# Altium PCB PCB1.PcbDoc (part 4 of 7)
Units mil, origin at the board's own origin, x right, y up, seen from the top; angles counter-clockwise.
Board outline 7650 x 4400 mil, 2 copper layers (Top Layer, Bottom Layer); 123 components, 190 nets, 788 pads, 165 vias.
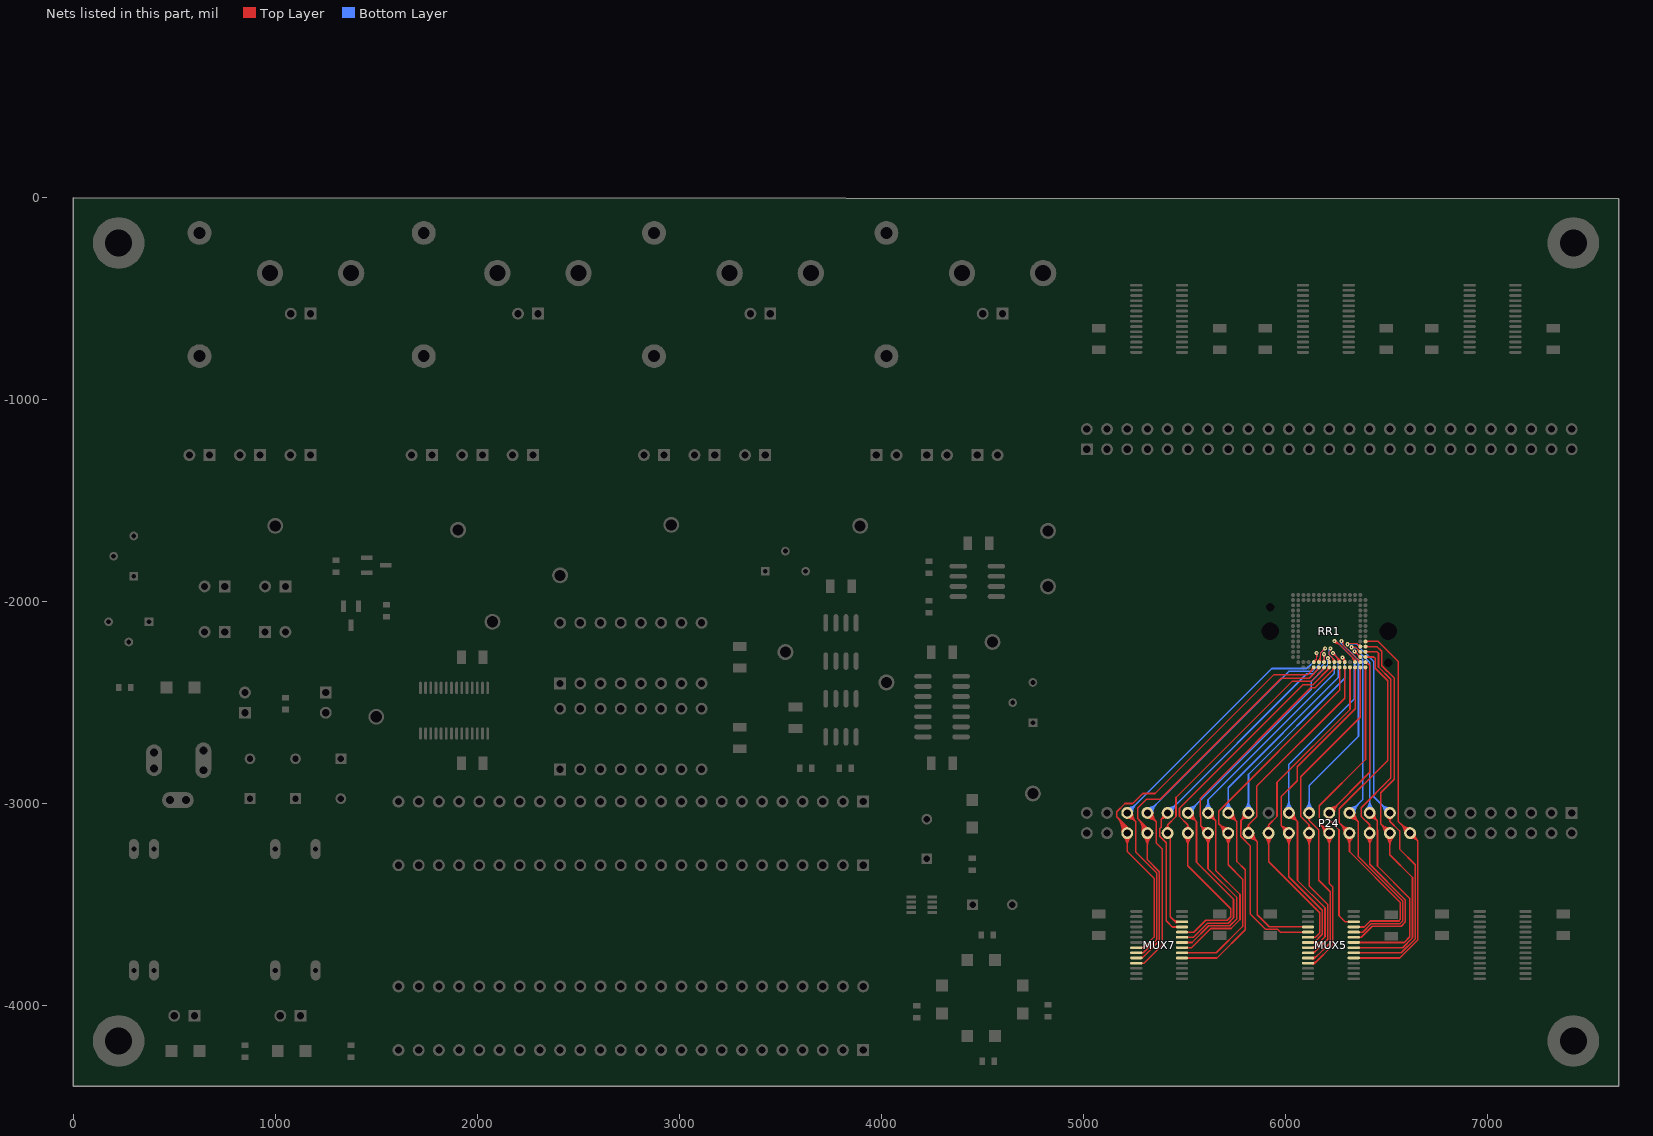
[diagram p4: the nets of this part, all layers, seen from the top]

## Via types
v1: diameter 30, hole 10, Top Layer to Bottom Layer, 118 vias
v2: diameter 20, hole 6, Top Layer to Bottom Layer, 47 vias

## Nets (pads, with @x,y where several pads share a name; then routed paths per layer and width w, separated by ;. In a path a pad name is that pad's centre, name@x,y a point inside that pad or via, vN(x,y) a via of type N, cw(c..) or ccw(c..) an arc to the next point about the centre after c; other vN are vias at no path point) (continued)
CELL64: MUX5.19 P24.18 RR1.68 | length 2336.5
  Top Layer w8: MUX5.19@6338.19,-3763.98 6566.02,-3763.98 6655,-3675 6655,-3184 ; RR1.68@6396.13,-2197.18 6459.66,-2197.18 6559,-2296.52 6559,-3088 P24.18@6617,-3146 6655,-3184 ; P24.18@6591.47,-3146 ccw(c6529.84,-3146) 6573.42,-3102.42 ccw(c6617,-3058.84) P24.18@6617,-3120.47 ; P24.18@6599.47,-3146 ccw(c6557.16,-3146) 6587.08,-3116.08 ccw(c6617,-3086.16) P24.18@6617,-3128.47 ; P24.18@6618.78,-3163.44 cw(c6621.83,-3193.35) 6643.09,-3172.09 cw(c6664.35,-3150.83) P24.18@6634.44,-3147.78 ; P24.18@6619.59,-3171.4 cw(c6624.03,-3214.97) 6655,-3184 ; P24.18@6642.4,-3148.59 ccw(c6685.97,-3153.03) 6655,-3184 ; 6368.79,-3763.98 ccw(c6368.79,-3770.95) 6363.85,-3766.02 cw(c6368.79,-3770.95) 6368.79,-3763.98 ; 6368.79,-3763.98 cw(c6368.79,-3757) 6363.85,-3761.93 ccw(c6368.79,-3757) 6368.79,-3763.98 ; 6410.24,-2197.18 ccw(c6410.24,-2211.29) 6400.27,-2201.31 cw(c6410.24,-2211.29) 6410.24,-2197.18 ; 6410.24,-2197.18 cw(c6410.24,-2183.08) 6400.27,-2193.05 ccw(c6410.24,-2183.08) 6410.24,-2197.18
CELL65: MUX5.20 P24.19 RR1.69 | length 2346.5
  Top Layer w5: v2(6307,-2211) 6311.54,-2206.46 6354.23,-2206.46 RR1.69@6370.54,-2222.77 RR1.69@6363.77,-2222.77 ; 6361.84,-2217.68 ccw(c6372.15,-2214.91) RR1.69@6370.01,-2225.38 ; 6365.45,-2214.06 cw(c6362.68,-2224.38) RR1.69@6373.15,-2222.24 ; 6358.01,-2210.24 ccw(c6370.54,-2197.7) 6370.54,-2215.43 cw(c6370.54,-2197.7) 6358.01,-2210.24 ; 6358.01,-2210.24 cw(c6345.47,-2222.77) 6363.2,-2222.77 ccw(c6345.47,-2222.77) 6358.01,-2210.24
  Top Layer w8: MUX5.20@6338.19,-3738.39 6573.23,-3738.39 6642,-3669.62 6642,-3302 6565,-3225 6565,-3135 6517,-3087 ; P24.19@6505.74,-3068.91 cw(c6496.84,-3087) 6517,-3087 ; P24.19@6517,-3046 6517,-3087 ; P24.19@6528.26,-3068.91 ccw(c6537.16,-3087) 6517,-3087 ; 6368.79,-3738.39 ccw(c6368.79,-3745.36) 6363.85,-3740.43 cw(c6368.79,-3745.36) 6368.79,-3738.39 ; 6368.79,-3738.39 cw(c6368.79,-3731.41) 6363.85,-3736.34 ccw(c6368.79,-3731.41) 6368.79,-3738.39
  Bottom Layer w5: v2(6307,-2211) 6309.5,-2208.5 6349.5,-2208.5 6386,-2245
  Bottom Layer w8: 6386,-2245 6437,-2296 6437,-2966 P24.19@6517,-3046 ; P24.19@6491.47,-3046 ccw(c6429.84,-3046) 6473.42,-3002.42 ccw(c6517,-2958.84) P24.19@6517,-3020.47 ; P24.19@6499.47,-3046 ccw(c6457.16,-3046) 6487.08,-3016.08 ccw(c6517,-2986.16) P24.19@6517,-3028.47
CELL66: MUX5.21 P24.20 RR1.70 | length 2330.1
  Top Layer w8: MUX5.21@6338.19,-3712.8 6580.44,-3712.8 6629,-3664.23 6629,-3365.23 6517,-3253.23 P24.20@6517,-3146 6472,-3101 6472,-2946 6538,-2880 6538,-2378.08 6476.85,-2316.93 6476.85,-2245.85 6453.77,-2222.77 RR1.70@6396.13,-2222.77 ; P24.20@6491.47,-3146 ccw(c6429.84,-3146) 6473.42,-3102.42 ccw(c6517,-3058.84) P24.20@6517,-3120.47 ; P24.20@6498.95,-3164.05 cw(c6455.37,-3207.63) 6517,-3207.63 cw(c6578.63,-3207.63) P24.20@6535.05,-3164.05 ; P24.20@6499.47,-3146 ccw(c6457.16,-3146) 6487.08,-3116.08 ccw(c6517,-3086.16) P24.20@6517,-3128.47 ; P24.20@6504.61,-3158.39 cw(c6474.68,-3188.32) 6517,-3188.32 cw(c6559.32,-3188.32) P24.20@6529.39,-3158.39 ; 6368.79,-3712.8 ccw(c6368.79,-3719.77) 6363.85,-3714.84 cw(c6368.79,-3719.77) 6368.79,-3712.8 ; 6368.79,-3712.8 cw(c6368.79,-3705.82) 6363.85,-3710.75 ccw(c6368.79,-3705.82) 6368.79,-3712.8 ; 6410.24,-2222.77 ccw(c6410.24,-2236.88) 6400.27,-2226.9 cw(c6410.24,-2236.88) 6410.24,-2222.77 ; 6410.24,-2222.77 cw(c6410.24,-2208.67) 6400.27,-2218.64 ccw(c6410.24,-2208.67) 6410.24,-2222.77
CELL67: MUX5.22 P24.21 RR1.71 | length 2432.5
  Top Layer w5: v2(6327,-2226) 6348.18,-2226 RR1.71@6370.54,-2248.36 ; 6361.84,-2243.27 ccw(c6372.15,-2240.5) RR1.71@6370.01,-2250.97 ; 6365.45,-2239.65 cw(c6362.68,-2249.97) RR1.71@6373.15,-2247.83 ; 6345.11,-2226 ccw(c6345.11,-2244.11) 6332.3,-2231.3 cw(c6345.11,-2244.11) 6345.11,-2226 ; 6345.11,-2226 cw(c6345.11,-2207.89) 6332.3,-2220.7 ccw(c6345.11,-2207.89) 6345.11,-2226 ; 6358.01,-2235.83 ccw(c6370.54,-2223.29) 6370.54,-2241.02 cw(c6370.54,-2223.29) 6358.01,-2235.83 ; 6358.01,-2235.83 cw(c6345.47,-2248.36) 6363.2,-2248.36 ccw(c6345.47,-2248.36) 6358.01,-2235.83
  Top Layer w8: MUX5.22@6338.19,-3687.2 6587.64,-3687.2 6616,-3658.85 6616,-3469.62 6455.53,-3309.14 6455.53,-3129.51 6455,-3128.99 6455,-3084 ; P24.21@6417,-3046 6455,-3084 ; P24.21@6418.78,-3063.44 cw(c6421.83,-3093.35) 6443.09,-3072.09 cw(c6464.35,-3050.83) P24.21@6434.44,-3047.78 ; P24.21@6419.59,-3071.4 cw(c6424.03,-3114.97) 6455,-3084 ; P24.21@6442.4,-3048.59 ccw(c6485.97,-3053.03) 6455,-3084 ; 6368.79,-3687.2 ccw(c6368.79,-3694.18) 6363.85,-3689.25 cw(c6368.79,-3694.18) 6368.79,-3687.2 ; 6368.79,-3687.2 cw(c6368.79,-3680.23) 6363.85,-3685.16 ccw(c6368.79,-3680.23) 6368.79,-3687.2
  Bottom Layer w5: v2(6327,-2226) 6329.5,-2228.5 6349.25,-2228.5 ; 6381,-2265 6359.5,-2243.5 6359.5,-2238.75 6349.25,-2228.5 ; 6349.25,-2228.5 cw(c6349.25,-2206.25) 6332.61,-2221.02 ccw(c6349.25,-2206.25) 6349.25,-2228.5 ; v2@6328.87,-2224.34 ccw(c6338.12,-2216.13) 6338.12,-2228.5 cw(c6338.12,-2216.13) v2@6328.87,-2224.34 ; v2@6332.3,-2231.3 cw(c6339.07,-2238.07) 6339.07,-2228.5 ccw(c6339.07,-2238.07) v2@6332.3,-2231.3
  Bottom Layer w8: 6381,-2265 6417,-2301 P24.21@6417,-3046 ; P24.21@6398.95,-3027.95 ccw(c6355.37,-2984.37) 6417,-2984.37 ccw(c6478.63,-2984.37) P24.21@6435.05,-3027.95 ; P24.21@6404.61,-3033.61 ccw(c6374.68,-3003.68) 6417,-3003.68 ccw(c6459.32,-3003.68) P24.21@6429.39,-3033.61
CELL68: MUX5.23 P24.22 RR1.72 | length 2136
  Top Layer w8: MUX5.23@6338.19,-3661.61 6375.2,-3661.61 6430.16,-3606.65 6572.96,-3606.65 6593.46,-3586.15 6593.46,-3476.7 6417,-3300.23 P24.22@6417,-3146 6417,-3104.73 ; RR1.72@6396.13,-2248.36 6453.21,-2248.36 6460.85,-2256 6460.85,-2323.56 6522,-2384.71 6522,-2873.37 6375.47,-3019.9 6375.47,-3063.2 6417,-3104.73 ; P24.22@6398.95,-3164.05 cw(c6355.37,-3207.63) 6417,-3207.63 cw(c6478.63,-3207.63) P24.22@6435.05,-3164.05 ; P24.22@6404.61,-3158.39 cw(c6374.68,-3188.32) 6417,-3188.32 cw(c6459.32,-3188.32) P24.22@6429.39,-3158.39 ; P24.22@6405.6,-3123.16 ccw(c6396.4,-3104.73) 6417,-3104.73 ; P24.22@6428.4,-3123.16 cw(c6437.6,-3104.73) 6417,-3104.73 ; 6368.79,-3661.61 ccw(c6368.79,-3668.59) 6363.85,-3663.66 cw(c6368.79,-3668.59) 6368.79,-3661.61 ; 6368.79,-3661.61 cw(c6368.79,-3654.64) 6363.85,-3659.57 ccw(c6368.79,-3654.64) 6368.79,-3661.61 ; 6410.24,-2248.36 ccw(c6410.24,-2262.47) 6400.27,-2252.49 cw(c6410.24,-2262.47) 6410.24,-2248.36 ; 6410.24,-2248.36 cw(c6410.24,-2234.26) 6400.27,-2244.23 ccw(c6410.24,-2234.26) 6410.24,-2248.36
CELL69: MUX5.24 P24.23 RR1.73 | length 2355.5
  Top Layer w5: v2@6339.57,-2246.57 ccw(c6350.74,-2243.96) 6347.77,-2255.05 ; v2(6342,-2246) 6342.59,-2246 RR1.73@6370.54,-2273.95 ; v2@6342.43,-2243.54 cw(c6340.58,-2254.08) 6350.92,-2251.31 ; 6361.84,-2268.86 ccw(c6372.15,-2266.09) RR1.73@6370.01,-2276.56 ; 6365.45,-2265.24 cw(c6362.68,-2275.56) RR1.73@6373.15,-2273.42 ; 6358.01,-2261.42 ccw(c6370.54,-2248.88) 6370.54,-2266.61 cw(c6370.54,-2248.88) 6358.01,-2261.42 ; 6358.01,-2261.42 cw(c6345.47,-2273.95) 6363.2,-2273.95 ccw(c6345.47,-2273.95) 6358.01,-2261.42 ; v2@6342,-2253.5 cw(c6342,-2273.03) 6355.81,-2259.22 ccw(c6342,-2273.03) v2@6342,-2253.5 ; v2@6349.5,-2246 ccw(c6366.18,-2246) 6354.39,-2257.8 cw(c6366.18,-2246) v2@6349.5,-2246
  Top Layer w8: P24.23@6317,-3046 6360,-3089 ; P24.23@6317.17,-3063.53 cw(c6317.56,-3104.49) 6346.52,-3075.52 cw(c6375.49,-3046.56) P24.23@6334.53,-3046.17 ; P24.23@6317.24,-3071.53 cw(c6317.81,-3131.18) 6360,-3089 ; MUX5.24@6338.19,-3636.02 6382.41,-3636.02 6424.78,-3593.65 6567.58,-3593.65 6580.46,-3580.77 6580.46,-3482.08 6360,-3261.62 6360,-3089 ; P24.23@6342.53,-3046.24 ccw(c6402.18,-3046.81) 6360,-3089 ; 6368.79,-3636.02 ccw(c6368.79,-3643) 6363.85,-3638.07 cw(c6368.79,-3643) 6368.79,-3636.02 ; 6368.79,-3636.02 cw(c6368.79,-3629.05) 6363.85,-3633.98 ccw(c6368.79,-3629.05) 6368.79,-3636.02
  Bottom Layer w5: v2(6342,-2246) 6366,-2270 ; 6354.8,-2258.8 ccw(c6342,-2271.61) 6342,-2253.5 cw(c6342,-2271.61) 6354.8,-2258.8 ; 6354.8,-2258.8 cw(c6367.61,-2246) 6349.5,-2246 ccw(c6367.61,-2246) 6354.8,-2258.8
  Bottom Layer w8: P24.23@6317,-3046 6382,-2981 6382,-2286 6366,-2270 ; P24.23@6317,-3028.47 ccw(c6317,-2986.16) 6346.92,-3016.08 ccw(c6376.84,-3046) P24.23@6334.53,-3046 ; P24.23@6317,-3020.47 ccw(c6317,-2958.84) 6360.58,-3002.42 ccw(c6404.16,-3046) P24.23@6342.53,-3046
CELL70: MUX5.25 P24.24 RR1.74 | length 2231.4
  Top Layer w8: P24.24@6291.47,-3146 ccw(c6229.84,-3146) 6273.42,-3102.42 ccw(c6317,-3058.84) P24.24@6317,-3120.47 ; P24.24@6298.95,-3164.05 cw(c6255.37,-3207.63) 6317,-3207.63 cw(c6378.63,-3207.63) P24.24@6335.05,-3164.05 ; P24.24@6299.47,-3146 ccw(c6257.16,-3146) 6287.08,-3116.08 ccw(c6317,-3086.16) P24.24@6317,-3128.47 ; P24.24@6304.61,-3158.39 cw(c6274.68,-3188.32) 6317,-3188.32 cw(c6359.32,-3188.32) P24.24@6329.39,-3158.39 ; MUX5.25@6338.19,-3610.43 6389.57,-3610.43 6419.35,-3580.65 6562.19,-3580.65 6567.46,-3575.38 6567.46,-3487.46 6317,-3237 P24.24@6317,-3146 6267,-3096 6267,-3026 6506,-2787 6506,-2391.34 6444.85,-2330.19 6444.85,-2281 6437.8,-2273.95 RR1.74@6396.13,-2273.95 ; 6368.79,-3610.43 ccw(c6368.79,-3617.41) 6363.85,-3612.48 cw(c6368.79,-3617.41) 6368.79,-3610.43 ; 6368.79,-3610.43 cw(c6368.79,-3603.46) 6363.85,-3608.39 ccw(c6368.79,-3603.46) 6368.79,-3610.43 ; 6410.24,-2273.95 ccw(c6410.24,-2288.06) 6400.27,-2278.08 cw(c6410.24,-2288.06) 6410.24,-2273.95 ; 6410.24,-2273.95 cw(c6410.24,-2259.85) 6400.27,-2269.82 ccw(c6410.24,-2259.85) 6410.24,-2273.95
CELL71: MUX5.26 P24.25 RR1.75 | length 1714.9
  Top Layer w8: P24.25@6208.56,-3070.09 cw(c6204.38,-3082) 6217,-3082 ; P24.25@6217,-3028.47 ccw(c6217,-2986.16) 6246.92,-3016.08 ccw(c6276.84,-3046) P24.25@6234.53,-3046 ; P24.25@6217,-3020.47 ccw(c6217,-2958.84) 6260.58,-3002.42 ccw(c6304.16,-3046) P24.25@6242.53,-3046 ; P24.25@6225.44,-3070.09 ccw(c6229.62,-3082) 6217,-3082 ; MUX5.26@6338.19,-3584.84 6294.84,-3584.84 6265,-3555 6265,-3130 6217,-3082 ; RR1.75@6396.13,-2299.54 6401.43,-2299.54 6417.98,-2316.09 6417.98,-2845.02 P24.25@6217,-3046 6217,-3082 ; 6307.59,-3584.84 ccw(c6307.59,-3577.87) 6312.52,-3582.8 cw(c6307.59,-3577.87) 6307.59,-3584.84 ; 6307.59,-3584.84 cw(c6307.59,-3591.82) 6312.52,-3586.89 ccw(c6307.59,-3591.82) 6307.59,-3584.84 ; RR1.75@6396.13,-2305.39 cw(c6396.13,-2332.28) 6415.15,-2313.26 ccw(c6396.13,-2332.28) RR1.75@6396.13,-2305.39
CELL72: MUX5.11 P24.26 RR1.76 | length 2084.7
  Top Layer w8: MUX5.11@6111.81,-3789.57 6145.43,-3789.57 6235,-3700 6235,-3413.23 6217,-3395.23 P24.26@6217,-3146 6167,-3096 6167,-3011 6396.13,-2781.87 RR1.76@6396.13,-2325.13 ; MUX5.11@6135.43,-3794.68 ccw(c6135.43,-3782.87) 6143.78,-3791.22 ; MUX5.11@6135.43,-3786.68 ccw(c6135.43,-3755.56) 6157.44,-3777.56 ; P24.26@6191.47,-3146 ccw(c6129.84,-3146) 6173.42,-3102.42 ccw(c6217,-3058.84) P24.26@6217,-3120.47 ; P24.26@6198.95,-3164.05 cw(c6155.37,-3207.63) 6217,-3207.63 cw(c6278.63,-3207.63) P24.26@6235.05,-3164.05 ; P24.26@6199.47,-3146 ccw(c6157.16,-3146) 6187.08,-3116.08 ccw(c6217,-3086.16) P24.26@6217,-3128.47 ; P24.26@6204.61,-3158.39 cw(c6174.68,-3188.32) 6217,-3188.32 cw(c6259.32,-3188.32) P24.26@6229.39,-3158.39 ; 6142.41,-3789.57 ccw(c6142.41,-3796.54) 6137.48,-3791.61 cw(c6142.41,-3796.54) 6142.41,-3789.57 ; 6142.41,-3789.57 cw(c6142.41,-3782.59) 6137.48,-3787.52 ccw(c6142.41,-3782.59) 6142.41,-3789.57 ; 6396.13,-2339.24 ccw(c6382.03,-2339.24) 6392,-2329.27 cw(c6382.03,-2339.24) 6396.13,-2339.24 ; 6396.13,-2339.24 cw(c6410.24,-2339.24) 6400.27,-2329.27 ccw(c6410.24,-2339.24) 6396.13,-2339.24
CELL73: MUX5.10 P24.27 RR1.77 | length 2405.2
  Top Layer w5: v2(6277,-2196) 6287,-2206 ; 6361.84,-2294.45 ccw(c6372.15,-2291.68) RR1.77@6370.01,-2302.15 ; 6365.45,-2290.84 cw(c6362.68,-2301.15) RR1.77@6373.15,-2299.01 ; RR1.77@6370.54,-2299.54 6287,-2216 6287,-2206 ; 6287,-2206 ccw(c6280.22,-2212.77) 6278.42,-2203.37 cw(c6280.22,-2212.77) 6287,-2206 ; 6287,-2206 cw(c6293.77,-2199.22) 6284.37,-2197.42 ccw(c6293.77,-2199.22) 6287,-2206 ; 6358.01,-2287.01 ccw(c6370.54,-2274.47) 6370.54,-2292.2 cw(c6370.54,-2274.47) 6358.01,-2287.01 ; 6358.01,-2287.01 cw(c6345.47,-2299.54) 6363.2,-2299.54 ccw(c6345.47,-2299.54) 6358.01,-2287.01
  Top Layer w8: MUX5.10@6111.81,-3763.98 6146.02,-3763.98 6222,-3688 6222,-3436.62 6165,-3379.62 6165,-3130 6117,-3082 ; P24.27@6117,-3046 6117,-3082 ; MUX5.10@6137.94,-3765.42 cw(c6152.23,-3773.67) 6147.96,-3757.73 ; 6117,-3082 ccw(c6104.38,-3082) 6108.56,-3070.09 cw(c6104.38,-3082) 6117,-3082 ; 6117,-3082 cw(c6129.62,-3082) 6125.44,-3070.09 ccw(c6129.62,-3082) 6117,-3082 ; 6142.41,-3763.98 ccw(c6142.41,-3770.95) 6137.48,-3766.02 cw(c6142.41,-3770.95) 6142.41,-3763.98 ; 6142.41,-3763.98 cw(c6142.41,-3757) 6137.48,-3761.93 ccw(c6142.41,-3757) 6142.41,-3763.98 ; MUX5.10@6135.43,-3769.09 ccw(c6135.43,-3755.86) 6144.79,-3765.21 cw(c6135.43,-3755.86) MUX5.10@6135.43,-3769.09 ; MUX5.10@6135.43,-3761.09 ccw(c6135.43,-3728.54) 6158.45,-3751.55 cw(c6135.43,-3728.54) MUX5.10@6135.43,-3761.09
  Bottom Layer w5: v2(6277,-2196) 6277,-2205.75 6334.75,-2263.5 6334.81,-2263.5 6355.65,-2284.35
  Bottom Layer w8: P24.27@6098.95,-3027.95 ccw(c6055.37,-2984.37) 6117,-2984.37 ccw(c6178.63,-2984.37) P24.27@6135.05,-3027.95 ; P24.27@6104.61,-3033.61 ccw(c6074.68,-3003.68) 6117,-3003.68 ccw(c6159.32,-3003.68) P24.27@6129.39,-3033.61 ; P24.27@6117,-3046 6117,-2911 6362,-2666 6362,-2290.69 6355.65,-2284.35
CELL74: MUX5.9 P24.28 RR1.78 | length 1926.9
  Top Layer w8: P24.28@6098.95,-3164.05 cw(c6055.37,-3207.63) 6117,-3207.63 cw(c6178.63,-3207.63) P24.28@6135.05,-3164.05 ; P24.28@6104.61,-3158.39 cw(c6074.68,-3188.32) 6117,-3188.32 cw(c6159.32,-3188.32) P24.28@6129.39,-3158.39 ; P24.28@6105.6,-3123.16 ccw(c6096.4,-3104.73) 6117,-3104.73 ; MUX5.9@6111.81,-3738.39 6141.61,-3738.39 6209,-3671 6209,-3499 6117,-3407 P24.28@6117,-3146 6117,-3104.73 ; P24.28@6128.4,-3123.16 cw(c6137.6,-3104.73) 6117,-3104.73 ; MUX5.9@6137.94,-3739.83 cw(c6152.23,-3748.08) 6147.96,-3732.14 ; RR1.78@6366.41,-2329.27 cw(c6356.44,-2339.24) 6370.54,-2339.24 cw(c6384.65,-2339.24) RR1.78@6374.67,-2329.27 ; RR1.78@6370.54,-2325.13 6370.54,-2572.46 6075.47,-2867.53 6075.47,-3063.2 6117,-3104.73 ; MUX5.9@6135.43,-3735.5 ccw(c6135.43,-3713.6) 6150.92,-3729.08 cw(c6135.43,-3713.6) MUX5.9@6135.43,-3735.5
CELL75: MUX5.8 P24.29 RR1.79 | length 2733.4
  Top Layer w5: v2@6239.82,-2197.23 ccw(c6255.81,-2188.19) 6251.05,-2205.93 ; v2(6242,-2196) 6251.04,-2196 6343.14,-2288.09 6344.95,-2288.09 ; v2@6244.18,-2194.77 ccw(c6270.35,-2179.96) 6262.57,-2209.01 ; v2@6245.75,-2202.5 cw(c6250.68,-2211.04) 6253.23,-2201.51 ; 6332.21,-2279.38 ccw(c6361.06,-2271.65) RR1.79@6346.12,-2297.51 ; 6335.33,-2291.04 ccw(c6352.52,-2286.43) RR1.79@6343.62,-2301.84 ; RR1.79@6338.59,-2295.87 ccw(c6329.93,-2290.87) 6339.59,-2288.28 ; RR1.79@6344.95,-2299.54 6344.95,-2288.09 ; 6344.95,-2288.1 ccw(c6350.21,-2288.1) 6348.02,-2292.87 cw(c6350.21,-2288.1) 6344.95,-2288.1 ; 6344.95,-2288.1 cw(c6339.7,-2288.1) 6341.89,-2292.87 ccw(c6339.7,-2288.1) 6344.95,-2288.1 ; v2@6242,-2203.5 cw(c6242,-2243.43) 6270.24,-2215.2 ccw(c6242,-2243.43) v2@6242,-2203.5 ; v2@6242,-2198.5 cw(c6242,-2226.36) 6261.7,-2206.66 ccw(c6242,-2226.36) v2@6242,-2198.5 ; v2@6242,-2193.5 cw(c6242,-2209.29) 6253.17,-2198.13 ccw(c6242,-2209.29) v2@6242,-2193.5 ; 6325.61,-2270.57 cw(c6296.63,-2299.54) 6337.61,-2299.54 ccw(c6296.63,-2299.54) 6325.61,-2270.57 ; 6334.14,-2279.1 cw(c6313.7,-2299.54) 6342.61,-2299.54 ccw(c6313.7,-2299.54) 6334.14,-2279.1 ; 6342.68,-2287.64 cw(c6330.77,-2299.54) 6347.61,-2299.54 ccw(c6330.77,-2299.54) 6342.68,-2287.64
  Top Layer w8: P24.29@6017,-3046 6060,-3089 ; P24.29@6017.17,-3063.53 cw(c6017.56,-3104.49) 6046.52,-3075.52 cw(c6075.49,-3046.56) P24.29@6034.53,-3046.17 ; P24.29@6017.24,-3071.53 cw(c6017.81,-3131.18) 6060,-3089 ; P24.29@6042.53,-3046.24 ccw(c6102.18,-3046.81) 6060,-3089 ; MUX5.8@6111.81,-3712.8 6142.2,-3712.8 6196,-3659 6196,-3516 6060,-3380 6060,-3089 ; MUX5.8@6137.94,-3714.24 cw(c6152.23,-3722.49) 6147.96,-3706.55 ; MUX5.8@6135.43,-3709.91 ccw(c6135.43,-3686.58) 6151.93,-3703.07 cw(c6135.43,-3686.58) MUX5.8@6135.43,-3709.91
  Bottom Layer w5: v2(6242,-2196) 6251.04,-2196 6342,-2286.96
  Bottom Layer w8: P24.29@5998.95,-3027.95 ccw(c5955.37,-2984.37) 6017,-2984.37 ccw(c6078.63,-2984.37) P24.29@6035.05,-3027.95 ; P24.29@6004.61,-3033.61 ccw(c5974.68,-3003.68) 6017,-3003.68 ccw(c6059.32,-3003.68) P24.29@6029.39,-3033.61 ; P24.29@6017,-3046 6017,-2806 6342,-2481 6342,-2286.96
CELL76: MUX5.7 P24.30 RR1.80 | length 2039.6
  Top Layer w8: P24.30@5991.58,-3143.68 ccw(c5946.39,-3139.56) 5978.47,-3107.47 ; P24.30@5998.95,-3164.05 cw(c5955.37,-3207.63) 6017,-3207.63 cw(c6078.63,-3207.63) P24.30@6035.05,-3164.05 ; P24.30@5999.54,-3144.41 ccw(c5968.52,-3141.58) 5990.55,-3119.55 ccw(c6012.58,-3097.52) P24.30@6015.41,-3128.54 ; P24.30@6004.61,-3158.39 cw(c5974.68,-3188.32) 6017,-3188.32 cw(c6059.32,-3188.32) P24.30@6029.39,-3158.39 ; P24.30@6014.68,-3120.58 cw(c6010.56,-3075.39) 5978.47,-3107.47 ; MUX5.7@6111.81,-3687.2 6142.8,-3687.2 6183,-3647 6183,-3528 6017,-3362 P24.30@6017,-3146 5978.47,-3107.47 ; MUX5.7@6137.94,-3688.65 cw(c6152.23,-3696.9) 6147.96,-3680.96 ; RR1.80@6340.82,-2329.27 cw(c6330.85,-2339.24) 6344.95,-2339.24 cw(c6359.06,-2339.24) RR1.80@6349.08,-2329.27 ; RR1.80@6344.95,-2325.13 6344.95,-2530.67 6058.53,-2817.1 6058.53,-2886.47 5978.47,-2966.53 5978.47,-3107.47 ; 6142.41,-3687.2 ccw(c6142.41,-3694.18) 6137.48,-3689.25 cw(c6142.41,-3694.18) 6142.41,-3687.2 ; 6142.41,-3687.2 cw(c6142.41,-3680.23) 6137.48,-3685.16 ccw(c6142.41,-3680.23) 6142.41,-3687.2 ; MUX5.7@6135.43,-3684.31 ccw(c6135.43,-3659.56) 6152.93,-3677.07 cw(c6135.43,-3659.56) MUX5.7@6135.43,-3684.31
CELL77: MUX5.6 P24.32 RR1.82 | length 1928.6
  Top Layer w8: P24.32@5898.95,-3164.05 cw(c5855.37,-3207.63) 5917,-3207.63 cw(c5978.63,-3207.63) P24.32@5935.05,-3164.05 ; P24.32@5904.61,-3158.39 cw(c5874.68,-3188.32) 5917,-3188.32 cw(c5959.32,-3188.32) P24.32@5929.39,-3158.39 ; P24.32@5905.6,-3123.16 ccw(c5896.4,-3104.73) 5917,-3104.73 ; P24.32@5928.4,-3123.16 cw(c5937.6,-3104.73) 5917,-3104.73 ; MUX5.6@6111.81,-3661.61 6148.39,-3661.61 6170,-3640 6170,-3540 5917,-3287 P24.32@5917,-3146 5917,-3104.73 ; RR1.82@6319.36,-2325.13 6319.36,-2533.64 5958.53,-2894.47 5958.53,-3063.2 5917,-3104.73 ; 6142.41,-3661.61 ccw(c6142.41,-3668.59) 6137.48,-3663.66 cw(c6142.41,-3668.59) 6142.41,-3661.61 ; 6142.41,-3661.61 cw(c6142.41,-3654.64) 6137.48,-3659.57 ccw(c6142.41,-3654.64) 6142.41,-3661.61 ; 6319.36,-2339.24 ccw(c6305.26,-2339.24) 6315.23,-2329.27 cw(c6305.26,-2339.24) 6319.36,-2339.24 ; 6319.36,-2339.24 cw(c6333.47,-2339.24) 6323.49,-2329.27 ccw(c6333.47,-2339.24) 6319.36,-2339.24
CELL78: MUX5.5 P24.33 RR1.83 | length 2589.9
  Top Layer w5: v2@6279.66,-2276.88 ccw(c6291.47,-2272.44) 6288.96,-2284.81 ; v2@6281.45,-2283.48 cw(c6280.71,-2293.73) 6289.61,-2288.59 cw(c6299.24,-2283.03) v2@6288.94,-2278.83 ; v2@6282.88,-2273.66 cw(c6278.44,-2285.47) 6290.81,-2282.96 ; v2@6283.37,-2283.37 cw(c6284.14,-2287.49) 6287.76,-2285.4 cw(c6291.69,-2283.13) v2@6288.04,-2280.45 ; 6287.48,-2288.35 ccw(c6305.23,-2289.65) RR1.83@6291.76,-2301.28 ; 6287.68,-2285.25 cw(c6282.63,-2290.29) RR1.83@6288.12,-2294.85 ; 6291.56,-2289.13 cw(c6286.87,-2293.81) RR1.83@6291.97,-2298.05 ; RR1.83@6293.77,-2299.54 6293.77,-2287.77 ; v2@6281.67,-2283.49 cw(c6281.08,-2296.68) RR1.83@6292.51,-2290.08 ; v2@6281.67,-2283.49 cw(c6281.08,-2296.68) RR1.83@6292.51,-2290.08 ; v2@6281.67,-2283.49 cw(c6281.08,-2296.68) RR1.83@6292.51,-2290.08 ; v2(6282,-2276) cw(c6267.58,-2290.42) 6286.84,-2297.13 ccw(c6267.58,-2290.42) v2(6282,-2276) ; v2(6282,-2276) 6293.77,-2287.77 ; v2@6283.4,-2283.37 cw(c6284.09,-2286.98) 6287.28,-2285.14 ; v2@6283.4,-2283.37 cw(c6284.09,-2286.98) 6287.28,-2285.14 ; v2@6283.4,-2283.37 cw(c6284.09,-2286.98) 6287.28,-2285.14 ; 6287.28,-2285.14 cw(c6290.46,-2283.3) v2@6287.68,-2280.9 ; 6287.28,-2285.14 cw(c6290.46,-2283.3) v2@6287.68,-2280.9 ; 6287.28,-2285.14 cw(c6290.46,-2283.3) v2@6287.68,-2280.9 ; v2@6289.24,-2277.94 ccw(c6299.93,-2280.8) 6290.35,-2286.34 ; v2@6289.24,-2277.94 ccw(c6299.93,-2280.8) 6290.35,-2286.34 ; v2@6289.24,-2277.94 ccw(c6299.93,-2280.8) 6290.35,-2286.34 ; 6293.77,-2287.77 ccw(c6299.54,-2287.77) 6297,-2292.95 cw(c6299.54,-2287.77) 6293.77,-2287.77 ; 6293.77,-2287.77 cw(c6288.01,-2287.77) 6290.54,-2292.95 ccw(c6288.01,-2287.77) 6293.77,-2287.77 ; 6293.77,-2287.77 ccw(c6283.36,-2298.18) 6282.46,-2283.49 cw(c6283.36,-2298.18) 6293.77,-2287.77 ; 6293.77,-2287.77 cw(c6304.18,-2277.36) 6289.49,-2276.46 ccw(c6304.18,-2277.36) 6293.77,-2287.77 ; v2@6287.64,-2281.64 cw(c6275.94,-2293.33) 6291.56,-2298.77 ccw(c6275.94,-2293.33) v2@6287.64,-2281.64 ; 6293.27,-2287.27 cw(c6284.3,-2296.24) 6296.28,-2300.42 ccw(c6284.3,-2296.24) 6293.27,-2287.27
  Top Layer w8: P24.33@5791.66,-3049.12 cw(c5751.11,-3054.11) 5780,-3083 ; P24.33@5799.6,-3048.14 cw(c5771.76,-3051.57) 5791.6,-3071.4 cw(c5811.43,-3091.24) P24.33@5814.86,-3063.4 ; P24.33@5813.88,-3071.34 ccw(c5808.89,-3111.89) 5780,-3083 ; P24.33@5817,-3046 5780,-3083 ; MUX5.5@6111.81,-3636.02 5975.72,-3636.02 5962.19,-3622.5 5902.5,-3622.5 5825,-3545 5825,-3208.49 5778.47,-3161.96 5778.47,-3128.51 5780,-3126.99 5780,-3083 ; 6081.21,-3636.02 ccw(c6081.21,-3629.05) 6086.15,-3633.98 cw(c6081.21,-3629.05) 6081.21,-3636.02 ; 6081.21,-3636.02 cw(c6081.21,-3643) 6086.15,-3638.07 ccw(c6081.21,-3643) 6081.21,-3636.02
  Bottom Layer w5: v2(6282,-2276) 6293.77,-2287.77 ; 6293.77,-2340 6293.77,-2287.77 ; 6293.77,-2287.77 ccw(c6283.36,-2298.18) 6282.46,-2283.49 cw(c6283.36,-2298.18) 6293.77,-2287.77 ; 6293.77,-2287.77 cw(c6304.18,-2277.36) 6289.49,-2276.46 ccw(c6304.18,-2277.36) 6293.77,-2287.77
  Bottom Layer w8: P24.33@5798.95,-3027.95 ccw(c5755.37,-2984.37) 5817,-2984.37 ccw(c5878.63,-2984.37) P24.33@5835.05,-3027.95 ; P24.33@5804.61,-3033.61 ccw(c5774.68,-3003.68) 5817,-3003.68 ccw(c5859.32,-3003.68) P24.33@5829.39,-3033.61 ; P24.33@5817,-3046 5817,-2856 6293.77,-2379.23 6293.77,-2340
CELL79: MUX5.4 P24.34 RR1.84 | length 1960.6
  Top Layer w8: P24.34@5805.6,-3123.16 ccw(c5796.4,-3104.73) 5817,-3104.73 ; P24.34@5817.17,-3163.53 cw(c5817.56,-3204.49) 5846.52,-3175.52 cw(c5875.49,-3146.56) P24.34@5834.53,-3146.17 ; P24.34@5817.24,-3171.53 cw(c5817.81,-3231.18) 5860,-3189 ; P24.34@5828.4,-3123.16 cw(c5837.6,-3104.73) 5817,-3104.73 ; P24.34@5842.53,-3146.24 ccw(c5902.18,-3146.81) 5860,-3189 ; MUX5.4@6111.81,-3610.43 6110.87,-3609.5 5919.8,-3609.5 5860,-3549.7 5860,-3189 ; RR1.84@6289.64,-2329.27 cw(c6279.67,-2339.24) 6293.77,-2339.24 cw(c6307.88,-2339.24) RR1.84@6297.9,-2329.27 ; RR1.84@6293.77,-2325.13 6293.77,-2477.79 5858.53,-2913.04 5858.53,-3063.2 5817,-3104.73 ; 5817,-3104.73 P24.34@5817,-3146 5860,-3189 ; 6078.95,-3609.5 cw(c6078.95,-3619.67) 6086.15,-3612.48 ccw(c6078.95,-3619.67) 6078.95,-3609.5
CELL80: MUX7.19 P24.35 RR1.85 | length 2784.7
  Top Layer w5: v2@6232.87,-2255.93 ccw(c6243.73,-2253.71) 6240.86,-2264.41 ; v2(6235.32,-2255.43) 6268.18,-2288.29 ; v2@6235.82,-2252.98 cw(c6233.6,-2263.84) 6244.3,-2260.97 ; 6255.44,-2279.38 ccw(c6284.29,-2271.65) RR1.85@6269.35,-2297.51 ; 6258.56,-2291.04 ccw(c6275.75,-2286.43) RR1.85@6266.85,-2301.84 ; RR1.85@6261.82,-2295.87 ccw(c6253.16,-2290.87) 6262.82,-2288.28 ; 6263.33,-2290.17 ccw(c6274.45,-2287.19) RR1.85@6269.24,-2297.45 ; RR1.85@6268.18,-2299.54 6268.18,-2288.29 ; 6248.12,-2268.23 ccw(c6235.32,-2281.04) 6235.32,-2262.93 cw(c6235.32,-2281.04) 6248.12,-2268.23 ; 6248.12,-2268.23 cw(c6260.93,-2255.43) 6242.82,-2255.43 ccw(c6260.93,-2255.43) 6248.12,-2268.23 ; 6268.18,-2288.29 ccw(c6273.13,-2288.29) 6271.14,-2292.82 cw(c6273.13,-2288.29) 6268.18,-2288.29 ; 6268.18,-2288.29 cw(c6263.23,-2288.29) 6265.22,-2292.82 ccw(c6263.23,-2288.29) 6268.18,-2288.29 ; 6247.69,-2267.8 cw(c6215.95,-2299.54) 6260.84,-2299.54 ccw(c6215.95,-2299.54) 6247.69,-2267.8 ; 6256.23,-2276.33 cw(c6233.02,-2299.54) 6265.84,-2299.54 ccw(c6233.02,-2299.54) 6256.23,-2276.33 ; 6264.76,-2284.87 cw(c6250.09,-2299.54) 6270.84,-2299.54 ccw(c6250.09,-2299.54) 6264.76,-2284.87
  Top Layer w8: MUX7.19@5488.19,-3763.98 5661.02,-3763.98 5801,-3624 5801,-3327.23 5760,-3286.23 5760,-3089 ; P24.35@5717,-3046 5760,-3089 ; P24.35@5717.17,-3063.53 cw(c5717.56,-3104.49) 5746.52,-3075.52 cw(c5775.49,-3046.56) P24.35@5734.53,-3046.17 ; P24.35@5717.24,-3071.53 cw(c5717.81,-3131.18) 5760,-3089 ; P24.35@5742.53,-3046.24 ccw(c5802.18,-3046.81) 5760,-3089 ; 5518.79,-3763.98 ccw(c5518.79,-3770.95) 5513.85,-3766.02 cw(c5518.79,-3770.95) 5518.79,-3763.98 ; 5518.79,-3763.98 cw(c5518.79,-3757) 5513.85,-3761.93 ccw(c5518.79,-3757) 5518.79,-3763.98
  Bottom Layer w5: v2(6235.32,-2255.43) 6262,-2282.11 6262,-2340 ; 6248.12,-2268.23 ccw(c6235.32,-2281.04) 6235.32,-2262.93 cw(c6235.32,-2281.04) 6248.12,-2268.23 ; 6248.12,-2268.23 cw(c6260.93,-2255.43) 6242.82,-2255.43 ccw(c6260.93,-2255.43) 6248.12,-2268.23
  Bottom Layer w8: P24.35@5698.95,-3027.95 ccw(c5655.37,-2984.37) 5717,-2984.37 ccw(c5778.63,-2984.37) P24.35@5735.05,-3027.95 ; P24.35@5704.61,-3033.61 ccw(c5674.68,-3003.68) 5717,-3003.68 ccw(c5759.32,-3003.68) P24.35@5729.39,-3033.61 ; P24.35@5717,-3046 5717,-2921 6262,-2376 6262,-2340
CELL81: MUX7.20 P24.36 RR1.86 | length 2304
  Top Layer w8: MUX7.20@5488.19,-3738.39 5657.61,-3738.39 5788,-3608 5788,-3373.62 5717,-3302.62 P24.36@5717,-3146 5670,-3099 5670,-3037.41 6268.18,-2439.23 RR1.86@6268.18,-2325.13 ; P24.36@5691.47,-3146 ccw(c5629.84,-3146) 5673.42,-3102.42 ccw(c5717,-3058.84) P24.36@5717,-3120.47 ; P24.36@5698.95,-3164.05 cw(c5655.37,-3207.63) 5717,-3207.63 cw(c5778.63,-3207.63) P24.36@5735.05,-3164.05 ; P24.36@5699.47,-3146 ccw(c5657.16,-3146) 5687.08,-3116.08 ccw(c5717,-3086.16) P24.36@5717,-3128.47 ; P24.36@5704.61,-3158.39 cw(c5674.68,-3188.32) 5717,-3188.32 cw(c5759.32,-3188.32) P24.36@5729.39,-3158.39 ; RR1.86@6264.05,-2329.27 cw(c6254.08,-2339.24) 6268.18,-2339.24 cw(c6282.29,-2339.24) RR1.86@6272.31,-2329.27 ; 5518.79,-3738.39 ccw(c5518.79,-3745.36) 5513.85,-3740.43 cw(c5518.79,-3745.36) 5518.79,-3738.39 ; 5518.79,-3738.39 cw(c5518.79,-3731.41) 5513.85,-3736.34 ccw(c5518.79,-3731.41) 5518.79,-3738.39
CELL82: MUX7.21 P24.37 RR1.87 | length 2609.8
  Top Layer w5: v2(6222,-2231) 6223.5,-2232.5 6223.5,-2242.5 6217.82,-2248.18 6217.82,-2262.68 6228.07,-2272.93 ; 6235,-2289.18 ccw(c6252.78,-2288.35) RR1.87@6240.8,-2301.51 ; RR1.87@6237.16,-2294.6 ccw(c6229.77,-2287.87) 6239.76,-2287.4 ; 6239.81,-2288.54 ccw(c6253.17,-2287.92) RR1.87@6244.17,-2297.81 ; RR1.87@6242,-2298.95 RR1.87@6242.59,-2299.54 6242.59,-2287.45 ; 6228.07,-2272.93 cw(c6208.83,-2292.17) 6235.42,-2297.98 ccw(c6208.83,-2292.17) 6228.07,-2272.93 ; 6228.07,-2272.93 6242.59,-2287.45 ; 6242.59,-2287.45 ccw(c6248.88,-2287.45) 6245.98,-2293.03 cw(c6248.88,-2287.45) 6242.59,-2287.45 ; 6242.59,-2287.45 cw(c6236.3,-2287.45) 6239.2,-2293.03 ccw(c6236.3,-2287.45) 6242.59,-2287.45 ; 6234.54,-2279.4 cw(c6219.45,-2294.49) 6240.3,-2299.04 ccw(c6219.45,-2294.49) 6234.54,-2279.4 ; 6241.01,-2285.87 cw(c6230.07,-2296.81) 6245.19,-2300.11 ccw(c6230.07,-2296.81) 6241.01,-2285.87
  Top Layer w8: MUX7.21@5488.19,-3712.8 5535.2,-3712.8 5630,-3618 5730.38,-3618 5775,-3573.38 5775,-3450 5655.53,-3330.53 5655.53,-3129.51 5655,-3128.99 5655,-3084 ; P24.37@5617,-3046 5655,-3084 ; P24.37@5618.78,-3063.44 cw(c5621.83,-3093.35) 5643.09,-3072.09 cw(c5664.35,-3050.83) P24.37@5634.44,-3047.78 ; P24.37@5619.59,-3071.4 cw(c5624.03,-3114.97) 5655,-3084 ; P24.37@5642.4,-3048.59 ccw(c5685.97,-3053.03) 5655,-3084 ; 5518.79,-3712.8 ccw(c5518.79,-3719.77) 5513.85,-3714.84 cw(c5518.79,-3719.77) 5518.79,-3712.8 ; 5518.79,-3712.8 cw(c5518.79,-3705.82) 5513.85,-3710.75 ccw(c5518.79,-3705.82) 5518.79,-3712.8
  Bottom Layer w5: v2(6222,-2231) 6217.82,-2235.18 6217.82,-2262.68 6228.07,-2272.93 6242,-2286.86 6242,-2321.43
  Bottom Layer w8: P24.37@5598.95,-3027.95 ccw(c5555.37,-2984.37) 5617,-2984.37 ccw(c5678.63,-2984.37) P24.37@5635.05,-3027.95 ; P24.37@5604.61,-3033.61 ccw(c5574.68,-3003.68) 5617,-3003.68 ccw(c5659.32,-3003.68) P24.37@5629.39,-3033.61 ; P24.37@5617,-3046 5617,-2981 6242,-2356 6242,-2321.43
CELL83: MUX7.22 P24.38 RR1.88 | length 2279.8
  Top Layer w8: MUX7.22@5488.19,-3687.2 5537.8,-3687.2 5620,-3605 5725,-3605 5760,-3570 5760,-3465 5617,-3322 P24.38@5617,-3146 5580,-3109 ; P24.38@5591.66,-3142.88 ccw(c5551.11,-3137.89) 5580,-3109 ; P24.38@5598.95,-3164.05 cw(c5555.37,-3207.63) 5617,-3207.63 cw(c5678.63,-3207.63) P24.38@5635.05,-3164.05 ; P24.38@5599.6,-3143.86 ccw(c5571.76,-3140.43) 5591.6,-3120.6 ccw(c5611.43,-3100.76) P24.38@5614.86,-3128.6 ; P24.38@5604.61,-3158.39 cw(c5574.68,-3188.32) 5617,-3188.32 cw(c5659.32,-3188.32) P24.38@5629.39,-3158.39 ; P24.38@5613.88,-3120.66 cw(c5608.89,-3080.11) 5580,-3109 ; RR1.88@6242.59,-2325.13 6242.59,-2330.43 6146.05,-2426.98 6126.02,-2426.98 5578.47,-2974.53 5578.47,-3063.49 5580,-3065.01 5580,-3109 ; 5518.79,-3687.2 ccw(c5518.79,-3694.18) 5513.85,-3689.25 cw(c5518.79,-3694.18) 5518.79,-3687.2 ; 5518.79,-3687.2 cw(c5518.79,-3680.23) 5513.85,-3685.16 ccw(c5518.79,-3680.23) 5518.79,-3687.2 ; 6228.87,-2344.15 ccw(c6209.85,-2325.13) 6236.75,-2325.13 cw(c6209.85,-2325.13) 6228.87,-2344.15
CELL84: MUX7.23 P24.39 RR1.89 | length 2489.1
  Top Layer w5: v2(6210,-2280) v2@6217,-2287 ; RR1.89@6217,-2299.54 v2@6217,-2287 ; v2@6209.43,-2282.43 cw(c6206.78,-2293.74) RR1.89@6218,-2290.74 ; v2@6209.43,-2282.43 cw(c6206.78,-2293.74) RR1.89@6218,-2290.74 ; v2@6209.43,-2282.43 cw(c6206.78,-2293.74) RR1.89@6218,-2290.74 ; v2@6217,-2287 ccw(c6224.04,-2287) 6220.59,-2293.14 cw(c6224.04,-2287) v2@6217,-2287 ; v2@6217,-2287 cw(c6209.96,-2287) 6213.41,-2293.14 ccw(c6209.96,-2287) v2@6217,-2287 ; v2@6207.42,-2287.04 cw(c6202.39,-2300.76) 6217,-2300.76 ccw(c6202.39,-2300.76) v2@6207.42,-2287.04 ; v2@6209.14,-2282.35 cw(c6205.01,-2293.6) 6217,-2293.6 ccw(c6205.01,-2293.6) v2@6209.14,-2282.35
  Top Layer w8: MUX7.23@5488.19,-3661.61 5545,-3661.61 5614.62,-3592 5716.38,-3592 5743,-3565.38 5743,-3473 5560,-3290 5560,-3089 ; P24.39@5517,-3046 5560,-3089 ; P24.39@5517.17,-3063.53 cw(c5517.56,-3104.49) 5546.52,-3075.52 cw(c5575.49,-3046.56) P24.39@5534.53,-3046.17 ; P24.39@5517.24,-3071.53 cw(c5517.81,-3131.18) 5560,-3089 ; P24.39@5542.53,-3046.24 ccw(c5602.18,-3046.81) 5560,-3089 ; 5518.79,-3661.61 ccw(c5518.79,-3668.59) 5513.85,-3663.66 cw(c5518.79,-3668.59) 5518.79,-3661.61 ; 5518.79,-3661.61 cw(c5518.79,-3654.64) 5513.85,-3659.57 ccw(c5518.79,-3654.64) 5518.79,-3661.61
  Bottom Layer w5: 6190,-2333 6210,-2313 v2(6210,-2280) ; v2@6204.7,-2285.3 cw(c6191.89,-2298.11) 6210,-2298.11 cw(c6228.11,-2298.11) v2@6215.3,-2285.3
  Bottom Layer w8: P24.39@5517,-3046 6127,-2436 6127,-2396 6190,-2333 ; P24.39@5517,-3028.47 ccw(c5517,-2986.16) 5546.92,-3016.08 ccw(c5576.84,-3046) P24.39@5534.53,-3046 ; P24.39@5517,-3020.47 ccw(c5517,-2958.84) 5560.58,-3002.42 ccw(c5604.16,-3046) P24.39@5542.53,-3046
CELL85: MUX7.24 P24.40 RR1.90 | length 2222.8
  Top Layer w8: MUX7.24@5488.19,-3636.02 5546.48,-3636.02 5605,-3577.5 5712.19,-3577.5 5714.7,-3575 5715,-3575 5730,-3560 5730,-3520 5517,-3307 P24.40@5517,-3146 5517,-3104.73 ; P24.40@5498.95,-3164.05 cw(c5455.37,-3207.63) 5517,-3207.63 cw(c5578.63,-3207.63) P24.40@5535.05,-3164.05 ; P24.40@5504.61,-3158.39 cw(c5474.68,-3188.32) 5517,-3188.32 cw(c5559.32,-3188.32) P24.40@5529.39,-3158.39 ; P24.40@5505.6,-3123.16 ccw(c5496.4,-3104.73) 5517,-3104.73 ; P24.40@5528.4,-3123.16 cw(c5537.6,-3104.73) 5517,-3104.73 ; RR1.90@6217,-2325.13 6217,-2330.43 6136.46,-2410.98 6087.02,-2410.98 5475.47,-3022.53 5475.47,-3063.2 5517,-3104.73 ; 5518.79,-3636.02 ccw(c5518.79,-3643) 5513.85,-3638.07 cw(c5518.79,-3643) 5518.79,-3636.02 ; 5518.79,-3636.02 cw(c5518.79,-3629.05) 5513.85,-3633.98 ccw(c5518.79,-3629.05) 5518.79,-3636.02 ; 6203.28,-2344.15 ccw(c6184.26,-2325.13) 6211.16,-2325.13 cw(c6184.26,-2325.13) 6203.28,-2344.15
CELL86: MUX7.25 P24.41 RR1.91 | length 2277.7
  Top Layer w5: v2(6191.41,-2260.5) RR1.91@6191.41,-2299.54 RR1.91@6194.62,-2296.33 ; v2@6194.62,-2263.87 v2@6198,-2260.5 ; 6191.41,-2281.82 ccw(c6209.14,-2281.82) 6196.6,-2294.35 cw(c6209.14,-2281.82) 6191.41,-2281.82 ; 6191.41,-2281.82 cw(c6173.68,-2281.82) 6186.22,-2294.35 ccw(c6173.68,-2281.82) 6191.41,-2281.82 ; 6191.41,-2278.6 ccw(c6173.3,-2278.6) 6186.11,-2265.8 cw(c6173.3,-2278.6) 6191.41,-2278.6 ; 6191.41,-2278.6 cw(c6209.52,-2278.6) 6196.71,-2265.8 ccw(c6209.52,-2278.6) 6191.41,-2278.6
  Top Layer w8: P24.41@5392.22,-3052.11 cw(c5365.66,-3058.66) 5385,-3078 ; P24.41@5399.98,-3050.2 cw(c5381.75,-3054.69) 5395.03,-3067.97 cw(c5408.31,-3081.25) P24.41@5412.8,-3063.02 ; P24.41@5410.89,-3070.78 ccw(c5404.34,-3097.34) 5385,-3078 ; P24.41@5417,-3046 5385,-3078 ; MUX7.25@5488.19,-3610.43 5440.43,-3610.43 5410,-3580 5410,-3193.49 5378.47,-3161.96 5378.47,-3123.51 5385,-3116.99 5385,-3078 ; 5457.59,-3610.43 ccw(c5457.59,-3603.46) 5462.52,-3608.39 cw(c5457.59,-3603.46) 5457.59,-3610.43 ; 5457.59,-3610.43 cw(c5457.59,-3617.41) 5462.52,-3612.48 ccw(c5457.59,-3617.41) 5457.59,-3610.43
  Bottom Layer w5: 6171.38,-2325 6192,-2304.38 v2@6192,-2260.5 ; v2@6186.11,-2265.8 cw(c6171.88,-2280.03) 6192,-2280.03 ccw(c6171.88,-2280.03) v2@6186.11,-2265.8 ; 6192,-2277.18 cw(c6208.09,-2277.18) 6196.71,-2265.8 ccw(c6208.09,-2277.18) 6192,-2277.18
  Bottom Layer w8: P24.41@5417,-3046 6106,-2357 6139.38,-2357 6171.38,-2325 ; P24.41@5417,-3028.47 ccw(c5417,-2986.16) 5446.92,-3016.08 ccw(c5476.84,-3046) P24.41@5434.53,-3046 ; P24.41@5417,-3020.47 ccw(c5417,-2958.84) 5460.58,-3002.42 ccw(c5504.16,-3046) P24.41@5442.53,-3046
CELL87: MUX7.26 P24.42 RR1.92 | length 1872.6
  Top Layer w8: P24.42@5405.6,-3123.16 ccw(c5396.4,-3104.73) 5417,-3104.73 ; P24.42@5428.4,-3123.16 cw(c5437.6,-3104.73) 5417,-3104.73 ; 5452.04,-3578.6 cw(c5447.77,-3594.54) MUX7.26@5462.06,-3586.29 ; MUX7.26@5488.19,-3584.84 5454.84,-3584.84 5430,-3560 5430,-3159 P24.42@5417,-3146 5417,-3104.73 ; RR1.92@6191.41,-2325.13 6191.41,-2330.43 6126.87,-2394.98 6033.02,-2394.98 5458.53,-2969.47 5458.53,-3063.2 5417,-3104.73 ; 5457.59,-3584.84 ccw(c5457.59,-3577.87) 5462.52,-3582.8 cw(c5457.59,-3577.87) 5457.59,-3584.84 ; 5457.59,-3584.84 cw(c5457.59,-3591.82) 5462.52,-3586.89 ccw(c5457.59,-3591.82) 5457.59,-3584.84 ; 5443.03,-3573.03 ccw(c5464.57,-3551.5) 5464.57,-3581.95 cw(c5464.57,-3551.5) 5443.03,-3573.03 ; 5456.69,-3586.69 ccw(c5464.57,-3578.81) 5464.57,-3589.95 cw(c5464.57,-3578.81) 5456.69,-3586.69 ; 6177.69,-2344.15 ccw(c6158.67,-2325.13) 6185.57,-2325.13 cw(c6158.67,-2325.13) 6177.69,-2344.15
CELL88: MUX7.11 P24.43 RR1.93 | length 2919.4
  Top Layer w5: RR1.93@6163.92,-2292.45 ccw(c6161.33,-2282.79) 6169.99,-2287.79 ; RR1.93@6165.82,-2299.54 6173.91,-2291.45 ; 6166.32,-2285.07 ccw(c6175.5,-2290.7) RR1.93@6167.55,-2297.96 ; RR1.93@6168.35,-2292.65 ccw(c6169.94,-2288.33) 6173.93,-2290.63 ; 6169.79,-2279.4 ccw(c6180.61,-2286.03) RR1.93@6171.24,-2294.59 ; 6172.12,-2284.1 ccw(c6182.23,-2289.94) RR1.93@6172.16,-2295.84 ; RR1.93@6172.91,-2297.64 cw(c6181.57,-2295.32) 6173.81,-2290.84 ; 6188.1,-2236.21 cw(c6198.29,-2238.94) v2@6196.6,-2228.53 ; 6191.13,-2240.07 ccw(c6188.12,-2228.82) v2@6199.43,-2231.59 ; v2(6197,-2231) 6196.16,-2231 6173.91,-2253.25 6173.91,-2291.45 ; 6173.91,-2291.45 ccw(c6177.62,-2295.16) 6172.7,-2296.99 cw(c6177.62,-2295.16) 6173.91,-2291.45 ; 6173.91,-2291.45 cw(c6170.2,-2287.75) 6168.38,-2292.66 ccw(c6170.2,-2287.75) 6173.91,-2291.45 ; RR1.93@6160.63,-2294.35 ccw(c6128.56,-2262.28) 6173.91,-2262.28 cw(c6128.56,-2262.28) RR1.93@6160.63,-2294.35 ; RR1.93@6164.16,-2297.89 ccw(c6140.63,-2274.36) 6173.91,-2274.36 cw(c6140.63,-2274.36) RR1.93@6164.16,-2297.89 ; RR1.93@6167.7,-2301.42 ccw(c6152.7,-2286.43) 6173.91,-2286.43 cw(c6152.7,-2286.43) RR1.93@6167.7,-2301.42 ; 6182.76,-2244.4 cw(c6197,-2258.64) 6197,-2238.5 ccw(c6197,-2258.64) 6182.76,-2244.4 ; 6184.79,-2242.37 ccw(c6173.43,-2231) 6189.5,-2231 cw(c6173.43,-2231) 6184.79,-2242.37
  Top Layer w8: MUX7.11@5261.81,-3789.57 5300.43,-3789.57 5390,-3700 5390,-3225 5360,-3195 5360,-3089 ; P24.43@5317,-3046 5360,-3089 ; P24.43@5317.17,-3063.53 cw(c5317.56,-3104.49) 5346.52,-3075.52 cw(c5375.49,-3046.56) P24.43@5334.53,-3046.17 ; P24.43@5317.24,-3071.53 cw(c5317.81,-3131.18) 5360,-3089 ; P24.43@5342.53,-3046.24 ccw(c5402.18,-3046.81) 5360,-3089 ; 5292.41,-3789.57 ccw(c5292.41,-3796.54) 5287.48,-3791.61 cw(c5292.41,-3796.54) 5292.41,-3789.57 ; 5292.41,-3789.57 cw(c5292.41,-3782.59) 5287.48,-3787.52 ccw(c5292.41,-3782.59) 5292.41,-3789.57
  Bottom Layer w5: 6162,-2316 6173.91,-2304.09 6173.91,-2253.25 6196.16,-2231 v2(6197,-2231) ; 6191.13,-2240.07 ccw(c6188.12,-2228.82) v2@6199.43,-2231.59 ; 6182.76,-2244.4 cw(c6197,-2258.64) 6197,-2238.5 ccw(c6197,-2258.64) 6182.76,-2244.4 ; 6184.79,-2242.37 ccw(c6173.43,-2231) 6189.5,-2231 cw(c6173.43,-2231) 6184.79,-2242.37
  Bottom Layer w8: P24.43@5317,-3046 6019,-2344 6134,-2344 6162,-2316 ; P24.43@5317,-3028.47 ccw(c5317,-2986.16) 5346.92,-3016.08 ccw(c5376.84,-3046) P24.43@5334.53,-3046 ; P24.43@5317,-3020.47 ccw(c5317,-2958.84) 5360.58,-3002.42 ccw(c5404.16,-3046) P24.43@5342.53,-3046
CELL89: MUX7.10 P24.44 RR1.94 | length 2517.7
  Top Layer w8: MUX7.10@5261.81,-3763.98 5291.02,-3763.98 5376,-3679 5376,-3336.62 5317,-3277.62 P24.44@5317,-3146 5317,-3122 5270,-3075 ; 5281.11,-3086.11 cw(c5234.29,-3132.92) P24.44@5299.69,-3143.26 ; MUX7.10@5287.94,-3765.42 cw(c5302.23,-3773.67) 5297.96,-3757.73 ; P24.44@5291.79,-3142.01 ccw(c5215.12,-3129.89) 5270,-3075 ; 5292.21,-3097.21 cw(c5253.47,-3135.96) P24.44@5307.59,-3144.51 ; P24.44@5298.95,-3164.05 cw(c5255.37,-3207.63) 5317,-3207.63 cw(c5378.63,-3207.63) P24.44@5335.05,-3164.05 ; 5303.32,-3108.32 cw(c5272.65,-3138.99) P24.44@5315.49,-3145.76 ; P24.44@5304.61,-3158.39 cw(c5274.68,-3188.32) 5317,-3188.32 cw(c5359.32,-3188.32) P24.44@5329.39,-3158.39 ; RR1.94@6165.82,-2325.13 6165.82,-2330.43 6117.28,-2378.98 5979.02,-2378.98 5380,-2978 5312,-2978 5270,-3020 5270,-3075 ; MUX7.10@5285.43,-3761.09 ccw(c5285.43,-3740.61) 5299.91,-3755.09 cw(c5285.43,-3740.61) MUX7.10@5285.43,-3761.09 ; 6152.1,-2344.15 ccw(c6133.08,-2325.13) 6159.98,-2325.13 cw(c6133.08,-2325.13) 6152.1,-2344.15
CELL90: MUX7.9 P24.45 RR1.95 | length 2695.9
  Top Layer w5: RR1.95@6137.62,-2299.01 cw(c6148.09,-2301.15) 6145.32,-2290.84 ; RR1.95@6140.76,-2302.15 ccw(c6138.62,-2291.68) 6148.94,-2294.45 ; RR1.95@6144.51,-2292.7 6143.97,-2292.7 6140.23,-2296.45 RR1.95@6140.23,-2299.54 6154.76,-2285.01 v2(6154.76,-2254.24) ; 6152.76,-2287.01 ccw(c6165.3,-2299.54) 6147.57,-2299.54 cw(c6165.3,-2299.54) 6152.76,-2287.01 ; 6152.76,-2287.01 cw(c6140.23,-2274.47) 6140.23,-2292.2 ccw(c6140.23,-2274.47) 6152.76,-2287.01 ; 6154.76,-2272.35 ccw(c6136.65,-2272.35) 6149.46,-2259.54 cw(c6136.65,-2272.35) 6154.76,-2272.35 ; 6154.76,-2272.35 cw(c6172.87,-2272.35) 6160.06,-2259.54 ccw(c6172.87,-2272.35) 6154.76,-2272.35
  Top Layer w8: P24.45@5217,-3046 5260,-3089 ; P24.45@5217.17,-3063.53 cw(c5217.56,-3104.49) 5246.52,-3075.52 cw(c5275.49,-3046.56) P24.45@5234.53,-3046.17 ; P24.45@5217.24,-3071.53 cw(c5217.81,-3131.18) 5260,-3089 ; P24.45@5242.53,-3046.24 ccw(c5302.18,-3046.81) 5260,-3089 ; MUX7.9@5261.81,-3738.39 5296.61,-3738.39 5363,-3672 5363,-3343 5260,-3240 5260,-3089 ; 5292.41,-3738.39 ccw(c5292.41,-3745.36) 5287.48,-3740.43 cw(c5292.41,-3745.36) 5292.41,-3738.39 ; 5292.41,-3738.39 cw(c5292.41,-3731.41) 5287.48,-3736.34 ccw(c5292.41,-3731.41) 5292.41,-3738.39
  Bottom Layer w5: 6125,-2312.21 6154.76,-2282.45 v2(6154.76,-2254.24) ; 6154.76,-2272.35 ccw(c6136.65,-2272.35) 6149.46,-2259.54 cw(c6136.65,-2272.35) 6154.76,-2272.35 ; 6154.76,-2272.35 cw(c6172.87,-2272.35) 6160.06,-2259.54 ccw(c6172.87,-2272.35) 6154.76,-2272.35
  Bottom Layer w8: P24.45@5217,-3046 5932,-2331 6106.21,-2331 6125,-2312.21 ; P24.45@5217,-3028.47 ccw(c5217,-2986.16) 5246.92,-3016.08 ccw(c5276.84,-3046) P24.45@5234.53,-3046 ; P24.45@5217,-3020.47 ccw(c5217,-2958.84) 5260.58,-3002.42 ccw(c5304.16,-3046) P24.45@5242.53,-3046
CELL91: MUX7.8 P24.46 RR1.96 | length 2618.8
  Top Layer w8: 5176.56,-3076.56 cw(c5119.39,-3133.73) P24.46@5199.61,-3143.81 ; 5188.12,-3088.12 cw(c5139.92,-3136.31) P24.46@5207.55,-3144.81 ; P24.46@5191.67,-3142.82 ccw(c5098.86,-3131.15) 5165,-3065 ; P24.46@5198.95,-3164.05 cw(c5155.37,-3207.63) 5217,-3207.63 cw(c5278.63,-3207.63) P24.46@5235.05,-3164.05 ; 5199.67,-3099.67 cw(c5160.45,-3138.89) P24.46@5215.48,-3145.81 ; P24.46@5204.61,-3158.39 cw(c5174.68,-3188.32) 5217,-3188.32 cw(c5259.32,-3188.32) P24.46@5229.39,-3158.39 ; 5211.23,-3111.23 cw(c5180.98,-3141.47) P24.46@5223.42,-3146.81 ; MUX7.8@5261.81,-3712.8 5297.2,-3712.8 5350,-3660 5350,-3370 5217,-3237 P24.46@5217,-3146 5217,-3117 5165,-3065 ; RR1.96@6140.23,-2325.13 6140.23,-2330.43 6107.69,-2362.98 5941.29,-2362.98 5354.27,-2950 5294.27,-2950 5245,-2999.27 5205.73,-2999.27 5165,-3040 5165,-3065 ; 5292.41,-3712.8 ccw(c5292.41,-3719.77) 5287.48,-3714.84 cw(c5292.41,-3719.77) 5292.41,-3712.8 ; 5292.41,-3712.8 cw(c5292.41,-3705.82) 5287.48,-3710.75 ccw(c5292.41,-3705.82) 5292.41,-3712.8 ; 6126.51,-2344.15 ccw(c6107.49,-2325.13) 6134.39,-2325.13 cw(c6107.49,-2325.13) 6126.51,-2344.15